# EAGLE board SensorModule (EAGLE 7.2.0)
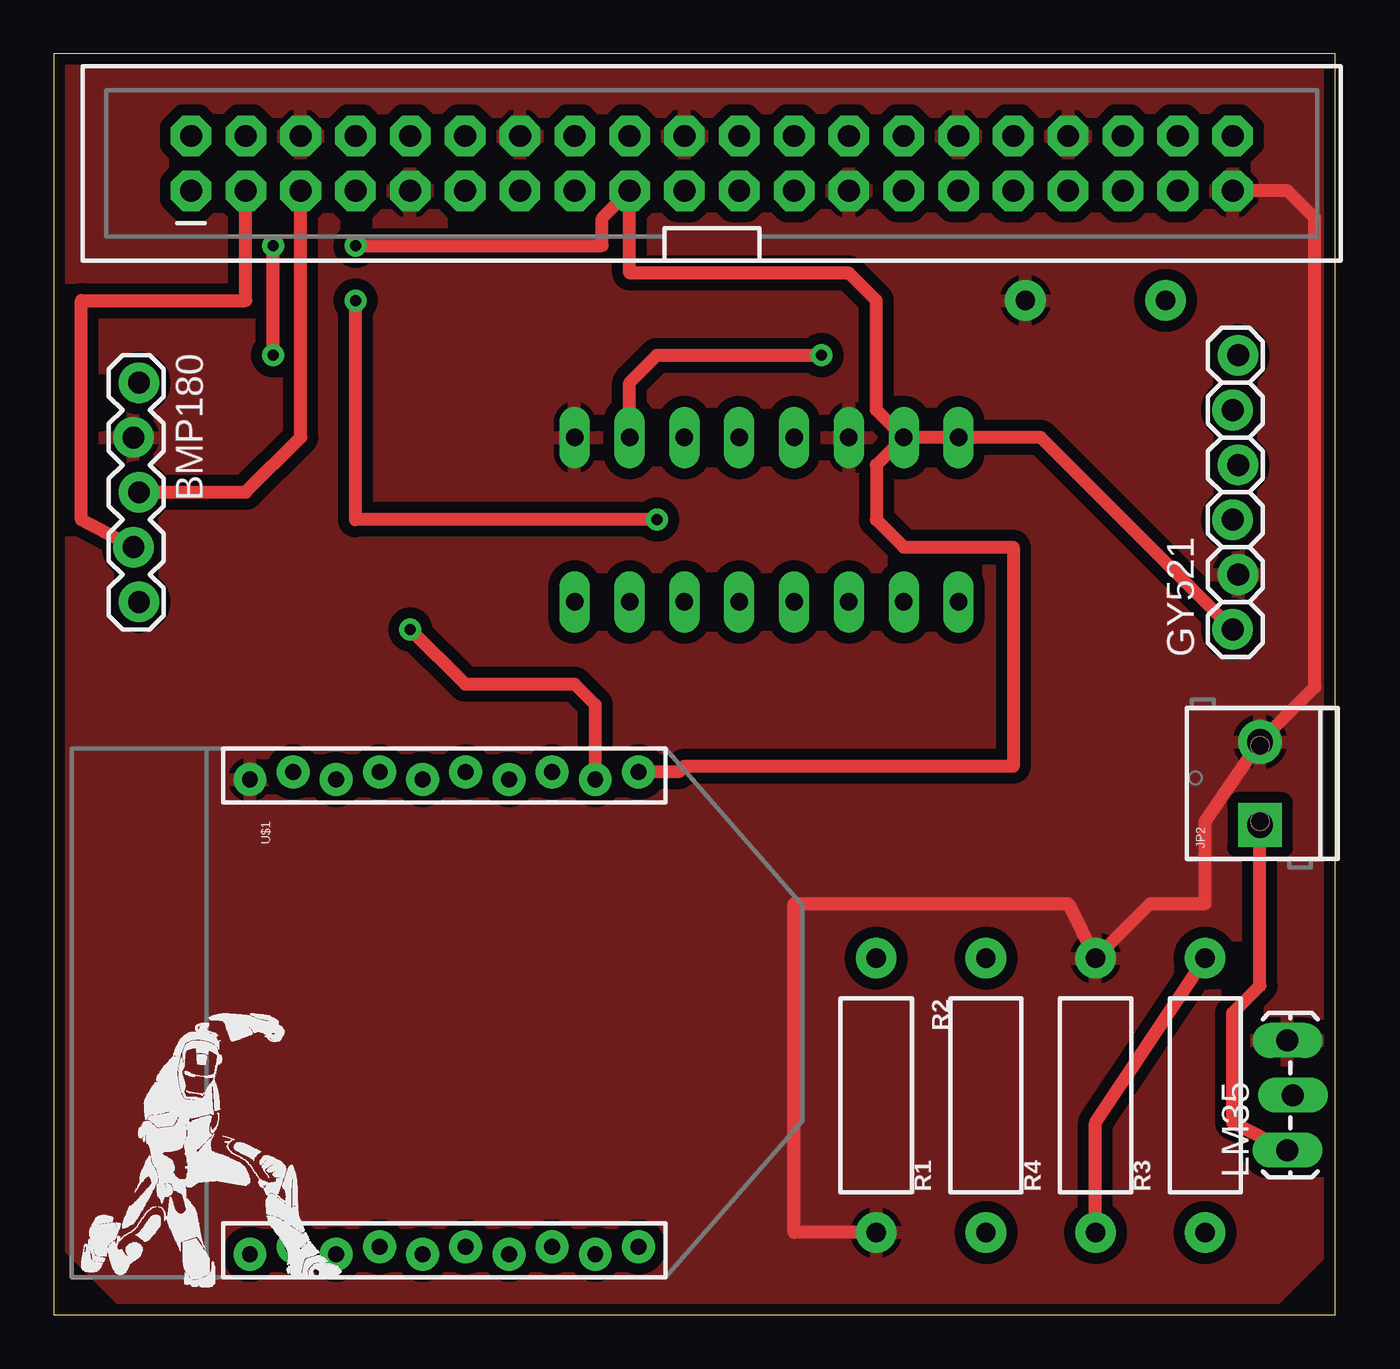
[diagram p0: board, top side]
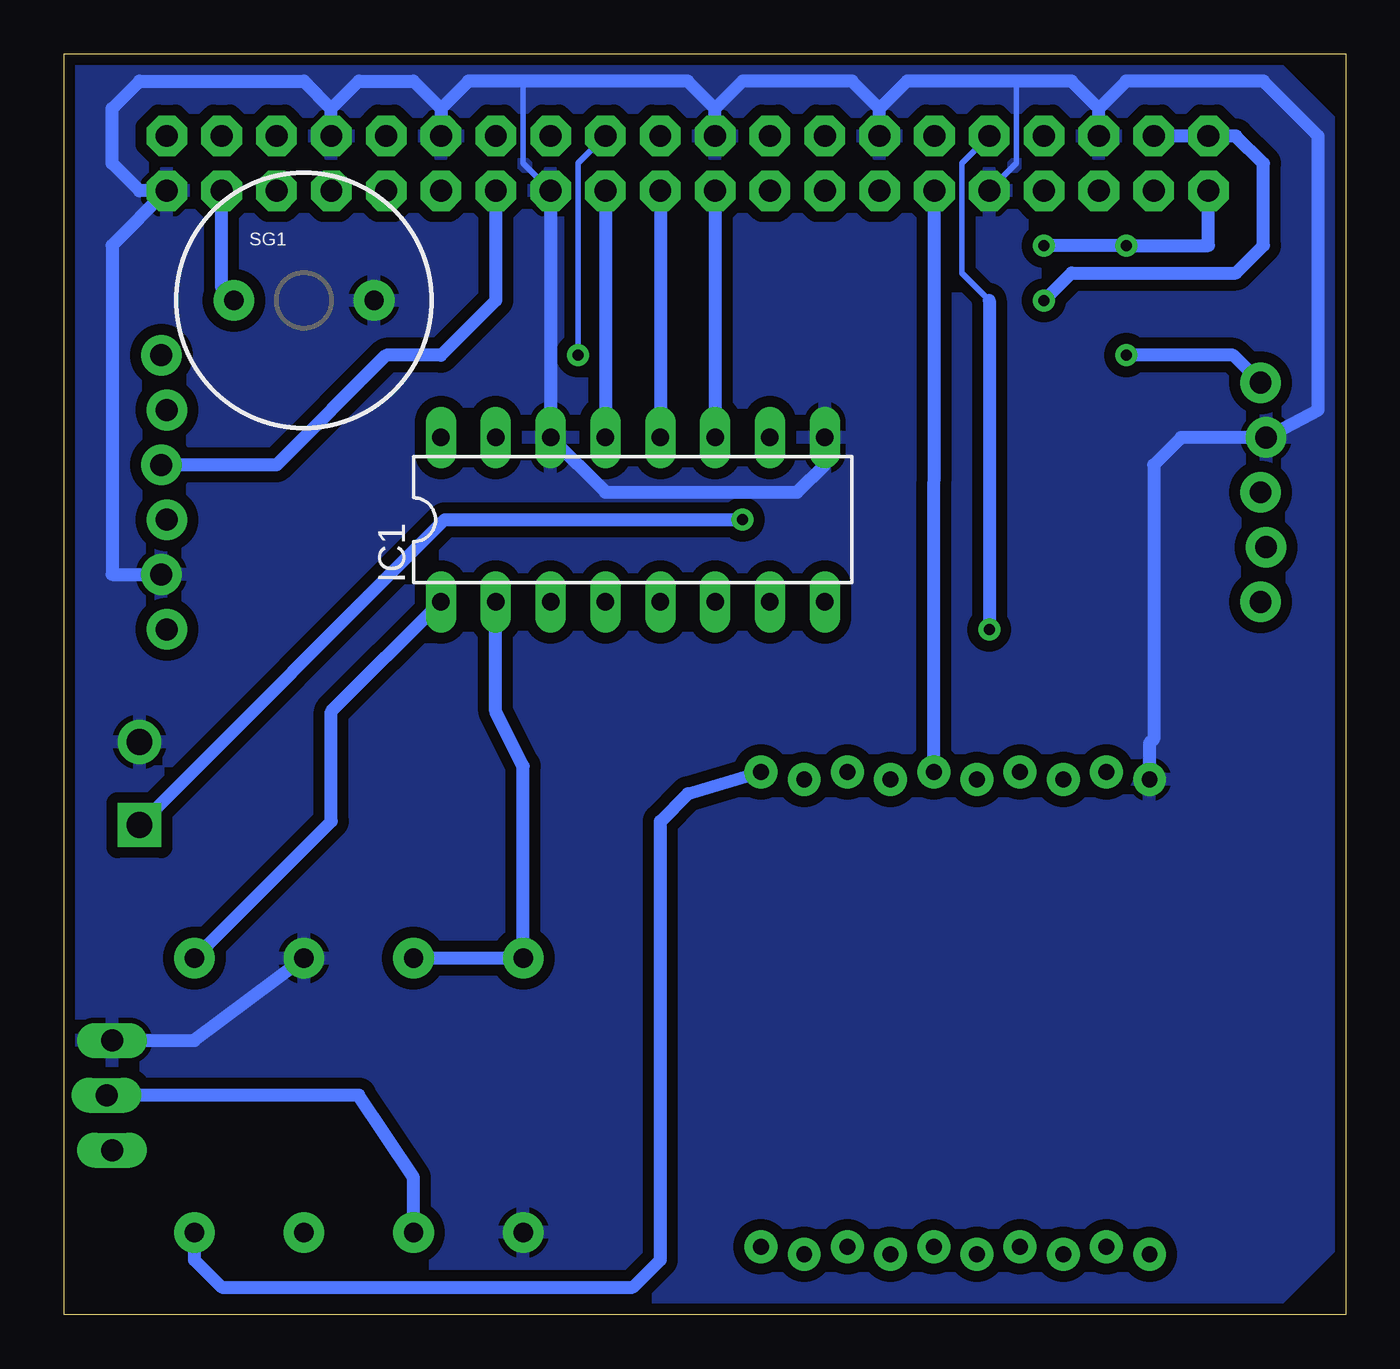
[diagram p1: board, bottom side, seen from below]

Size 59.36 x 58.41 mm. Coordinates in mm from the lower left corner, seen from the top.
Outline: 0,0 59.36,0 59.36,58.41 0,58.41 0,0
Copper layers (1*16): Top 0.035mm / dielectric 1.5mm / Bottom 0.035mm
Design rules "SparkFun": minimum track width 8mil, minimum drill 20mil, track to track 8mil, track to pad 8mil, pad to pad 8mil, via to via 8mil, smd to smd 8mil, copper to edge 8mil, drill to drill 8mil, minimum pad ring 12mil, minimum via ring 10mil, stop-mask expansion 4mil, vias tented up to drill 20mil, thermal gap 10mil

## Footprints (pad centres in the part's own frame; a part is rotated, then mirrored left to right if it is on the bottom)
1X05_LOCK = drill 1.016 pad 1.88: 1 0,0.127; 2 2.54,-0.127; 3 5.08,0.127; 4 7.62,-0.127; 5 10.16,0.127
1X06_LOCK = drill 1.016 pad 1.88: 1 0,0; 2 2.54,-0.254; 3 5.08,0; 4 7.62,-0.254; 5 10.16,0; 6 12.7,-0.254
DIL16 = drill 0.813 long: 1 -8.89,-3.81; 2 -6.35,-3.81; 3 -3.81,-3.81; 4 -1.27,-3.81; 5 1.27,-3.81; 6 3.81,-3.81; 7 6.35,-3.81; 8 8.89,-3.81; 9 8.89,3.81; 10 6.35,3.81; 11 3.81,3.81; 12 1.27,3.81; 13 -1.27,3.81; 14 -3.81,3.81; 15 -6.35,3.81; 16 -8.89,3.81
2X20-SHROUDED = drill 1.016 pad 1.88 octagon: 1 -1.27,24.13; 2 1.27,24.13; 3 -1.27,21.59; 4 1.27,21.59; 5 -1.27,19.05; 6 1.27,19.05; 7 -1.27,16.51; 8 1.27,16.51; 9 -1.27,13.97; 10 1.27,13.97; 11 -1.27,11.43; 12 1.27,11.43; 13 -1.27,8.89; 14 1.27,8.89; 15 -1.27,6.35; 16 1.27,6.35; 17 -1.27,3.81; 18 1.27,3.81; 19 -1.27,1.27; 20 1.27,1.27; 21 -1.27,-1.27; 22 1.27,-1.27; 23 -1.27,-3.81; 24 1.27,-3.81; 25 -1.27,-6.35; 26 1.27,-6.35; 27 -1.27,-8.89; 28 1.27,-8.89; 29 -1.27,-11.43; 30 1.27,-11.43; 31 -1.27,-13.97; 32 1.27,-13.97; 33 -1.27,-16.51; 34 1.27,-16.51; 35 -1.27,-19.05; 36 1.27,-19.05; 37 -1.27,-21.59; 38 1.27,-21.59; 39 -1.27,-24.13; 40 1.27,-24.13
SCREWTERMINAL-3.5MM-2_LOCK = drill 1.2 pad 2.032 square: 1 -0.178,0 | drill 1.2 pad 2.032: 2 3.678,0
1X03_LOCK_LONGPADS = drill 1.016 long: 1 0,0; 2 2.54,-0.254; 3 5.08,0
AXIAL-0.5 = drill 0.9 pad 1.88: P$1 -6.35,0; P$2 6.35,0
BUZZER-12MM-KIT = drill 0.9 pad 1.88: + 3.25,0; - -3.25,0
XBEE-1_LOCK = drill 0.737 pad 1.524: 1 -11.178,20; 2 -10.822,18; 3 -11.178,16; 4 -10.822,14; 5 -11.178,12; 6 -10.822,10; 7 -11.178,8; 8 -10.822,6; 9 -11.178,4; 10 -10.822,2; 11 11.178,2; 12 10.822,4; 13 11.178,6; 14 10.822,8; 15 11.178,10; 16 10.822,12; 17 11.178,14; 18 10.822,16; 19 11.178,18; 20 10.822,20

## Placement (x,y rotation side)
BMP180  [1X05_LOCK]  3.81,43.18 270 top
GY521  [1X06_LOCK]  54.61,31.75 90 top
IC1  MCP3008  [DIL16]  33.02,36.83 0 bottom
JP1  RASPBERRYPI-B+-GPIO  [2X20-SHROUDED]  30.48,53.34 90 top
JP2  [SCREWTERMINAL-3.5MM-2_LOCK]  55.88,22.86 90 top
LM35  [1X03_LOCK_LONGPADS]  57.15,7.62 90 top
R1  [AXIAL-0.5]  43.18,10.16 90 top
R2  [AXIAL-0.5]  38.1,10.16 270 top
R3  [AXIAL-0.5]  53.34,10.16 90 top
R4  [AXIAL-0.5]  48.26,10.16 90 top
SG1  BUZZERPTH-KIT  [BUZZER-12MM-KIT]  48.26,46.99 0 bottom
U$1  XBEE-2XBEE-1_LOCK  [XBEE-1_LOCK]  7.08,13.97 270 top

## Library data of the parts
BMP180 GY521 LM35 = SparkFun-Connectors
IC1 = adafruit
JP1 = SparkFun-Boards
JP2 = SparkFun-Connectors; PROD_ID: CONN-08399
R1-R4 = SparkFun-Passives
SG1 = SparkFun-Electromechanical; PROD_ID: COMP-08253
U$1 = SparkFun-RF

## Nets
BUZZ: JP1.37 SG1.-
CLK: IC1.13 JP1.23
CS: IC1.10 JP1.24
GND: BMP180.2 GY521.2 IC1.9 IC1.14 JP1.6 JP1.9 JP1.14 JP1.20 JP1.25 JP1.30 JP1.34 JP1.39 JP2.2 LM35.3 R2.P$2 R4.P$2 SG1.+ U$1.10
MISO: IC1.12 JP1.21
MOSI: IC1.11 JP1.19
N$1: IC1.3
N$2: IC1.4
N$3: IC1.5
N$4: IC1.6
N$6: IC1.7
N$7: IC1.8
N$8: U$1.20
N$9: U$1.19
N$10: U$1.18
N$11: U$1.17
N$12: U$1.16
N$13: U$1.15
N$14: U$1.14
N$15: U$1.13
N$16: U$1.12
N$17: U$1.11
N$18: U$1.4
N$19: U$1.6
N$20: U$1.7
N$21: U$1.8
N$22: U$1.9
NORMTEMP: IC1.2 R1.P$2 R2.P$1
NORMVOLT: IC1.1 R3.P$2 R4.P$1
RST: JP1.11 U$1.5
RX: JP1.8
SCL0: BMP180.3 JP1.5
SCL1: JP1.28
SDA0: BMP180.4 JP1.3
SDA1: GY521.4 JP1.27
TOUT: LM35.2 R1.P$1
TX: JP1.10 U$1.2
VCC: BMP180.1 GY521.1 IC1.15 IC1.16 JP1.1 JP1.17 R3.P$1 U$1.1
VIN: JP1.2 JP1.4 JP2.1 LM35.1

## Tracks (layer width: path | path; a pad name or v marks a point on that pad's centre or on a via)
BUZZ
  Bottom 0.406: SG1.- 52.07,47.55
  Bottom 0.61: 52.07,47.55 JP1.37
CLK
  Bottom 0.61: JP1.23 IC1.13
CS  (via drill 0.51)
  Top 0.61: IC1.10 26.67,43.18 27.94,44.45 v35.56,44.45
  Bottom 0.254: v35.56,44.45 35.56,53.34 JP1.24
GND
  Top 0.61: R2.P$2 34.29,3.81 34.29,19.05 46.99,19.05 R4.P$2 50.8,19.05 53.34,19.05 53.34,22.86 JP2.2 58.42,29.08 58.42,50.8 57.15,52.07 JP1.39
  Bottom 0.254: JP1.25 38.1,53.34 38.1,57.15 | JP1.9 15.24,53.34 15.24,57.15
  Bottom 0.61: JP1.25 IC1.14 34.29,38.1 25.4,38.1 24.13,39.37 IC1.9 | GY521.2 57.15,34.29 57.15,49.53 JP1.39 55.88,52.07 57.15,53.34 57.15,55.88 55.88,57.15 48.26,57.15 46.99,55.88 | JP1.34 46.99,55.88 | 46.99,55.88 45.72,57.15 43.18,57.15 41.91,55.88 | LM35.3 53.34,12.7 R4.P$2 | 11.43,55.88 10.16,57.15 3.81,57.15 1.27,54.61 1.27,41.91 BMP180.2 7.62,40.64 8.89,39.37 8.89,26.67 9.08,26.48 U$1.10 | JP1.6 11.43,55.88 | 11.43,55.88 12.7,57.15 15.24,57.15 20.32,57.15 21.59,55.88 | JP1.14 21.59,55.88 | 21.59,55.88 22.86,57.15 27.94,57.15 29.21,55.88 | JP1.20 29.21,55.88 | 29.21,55.88 30.48,57.15 38.1,57.15 40.64,57.15 41.91,55.88 | 41.91,55.88 JP1.30
  pour Top (isolate 0.508): 0,58.42 59.69,58.42 59.69,3.81 55.88,0 3.81,0 2.54,1.27 0,3.81
  pour Bottom (isolate 0.508): 0,54.61 3.81,58.42 58.42,58.42 59.69,57.15 59.69,3.81 55.88,0 3.81,0 0,3.81
MISO
  Bottom 0.61: JP1.21 IC1.12
MOSI
  Bottom 0.61: JP1.19 IC1.11
NORMTEMP
  Bottom 0.61: R1.P$2 R2.P$1 38.1,25.4 39.37,27.94 IC1.2
NORMVOLT
  Top 0.61: R4.P$1 48.26,8.89 R3.P$2
  Bottom 0.61: R3.P$2 46.99,22.86 46.99,27.94 IC1.1
RST
  Bottom 0.61: U$1.5 JP1.11
SCL0
  Top 0.61: BMP180.3 8.89,38.1 11.43,40.64 JP1.5
SDA0
  Top 0.61: BMP180.4 1.27,36.83 1.27,46.99 8.89,46.99 JP1.3
SDA1
  Bottom 0.61: JP1.27 39.37,46.99 41.91,44.45 44.45,44.45 49.53,39.37 GY521.4
TOUT
  Bottom 0.61: R1.P$1 43.18,6.35 45.72,10.16 LM35.2
TX  (via drill 0.51)
  Top 0.61: v16.51,31.75 19.05,29.21 24.13,29.21 25.08,28.26 U$1.2
  Bottom 0.254: JP1.10 17.78,53.34 17.78,48.26 16.51,46.99
  Bottom 0.61: 16.51,46.99 v16.51,31.75
VCC  (via drill 0.51)
  Top 0.61: GY521.1 45.72,40.64 IC1.16 IC1.15 | IC1.15 38.1,39.37 38.1,36.83 39.37,35.56 44.45,35.56 44.45,25.4 29.21,25.4 28.96,25.15 U$1.1 | v10.16,44.45 v10.16,49.53 | IC1.15 38.1,41.91 38.1,46.99 36.83,48.26 26.67,48.26 JP1.17 25.4,50.8 25.4,49.53 v13.97,49.53
  Bottom 0.61: BMP180.1 5.21,44.45 v10.16,44.45 | JP1.1 6.35,49.53 v10.16,49.53 v13.97,49.53 | R3.P$1 53.34,2.54 52.07,1.27 33.02,1.27 31.75,2.54 31.75,22.86 30.48,24.13 U$1.1
VIN  (via drill 0.51)
  Top 0.61: LM35.1 54.61,8.89 54.61,13.97 55.88,15.24 JP2.1 | v27.94,36.83 13.97,36.83 v13.97,46.99
  Bottom 0.61: JP1.4 JP1.2 5.08,54.61 3.81,53.34 3.81,49.53 5.08,48.26 12.7,48.26 v13.97,46.99 | JP2.1 41.73,36.83 v27.94,36.83